# EAGLE board Stepper5_backup (EAGLE 7.6.0)
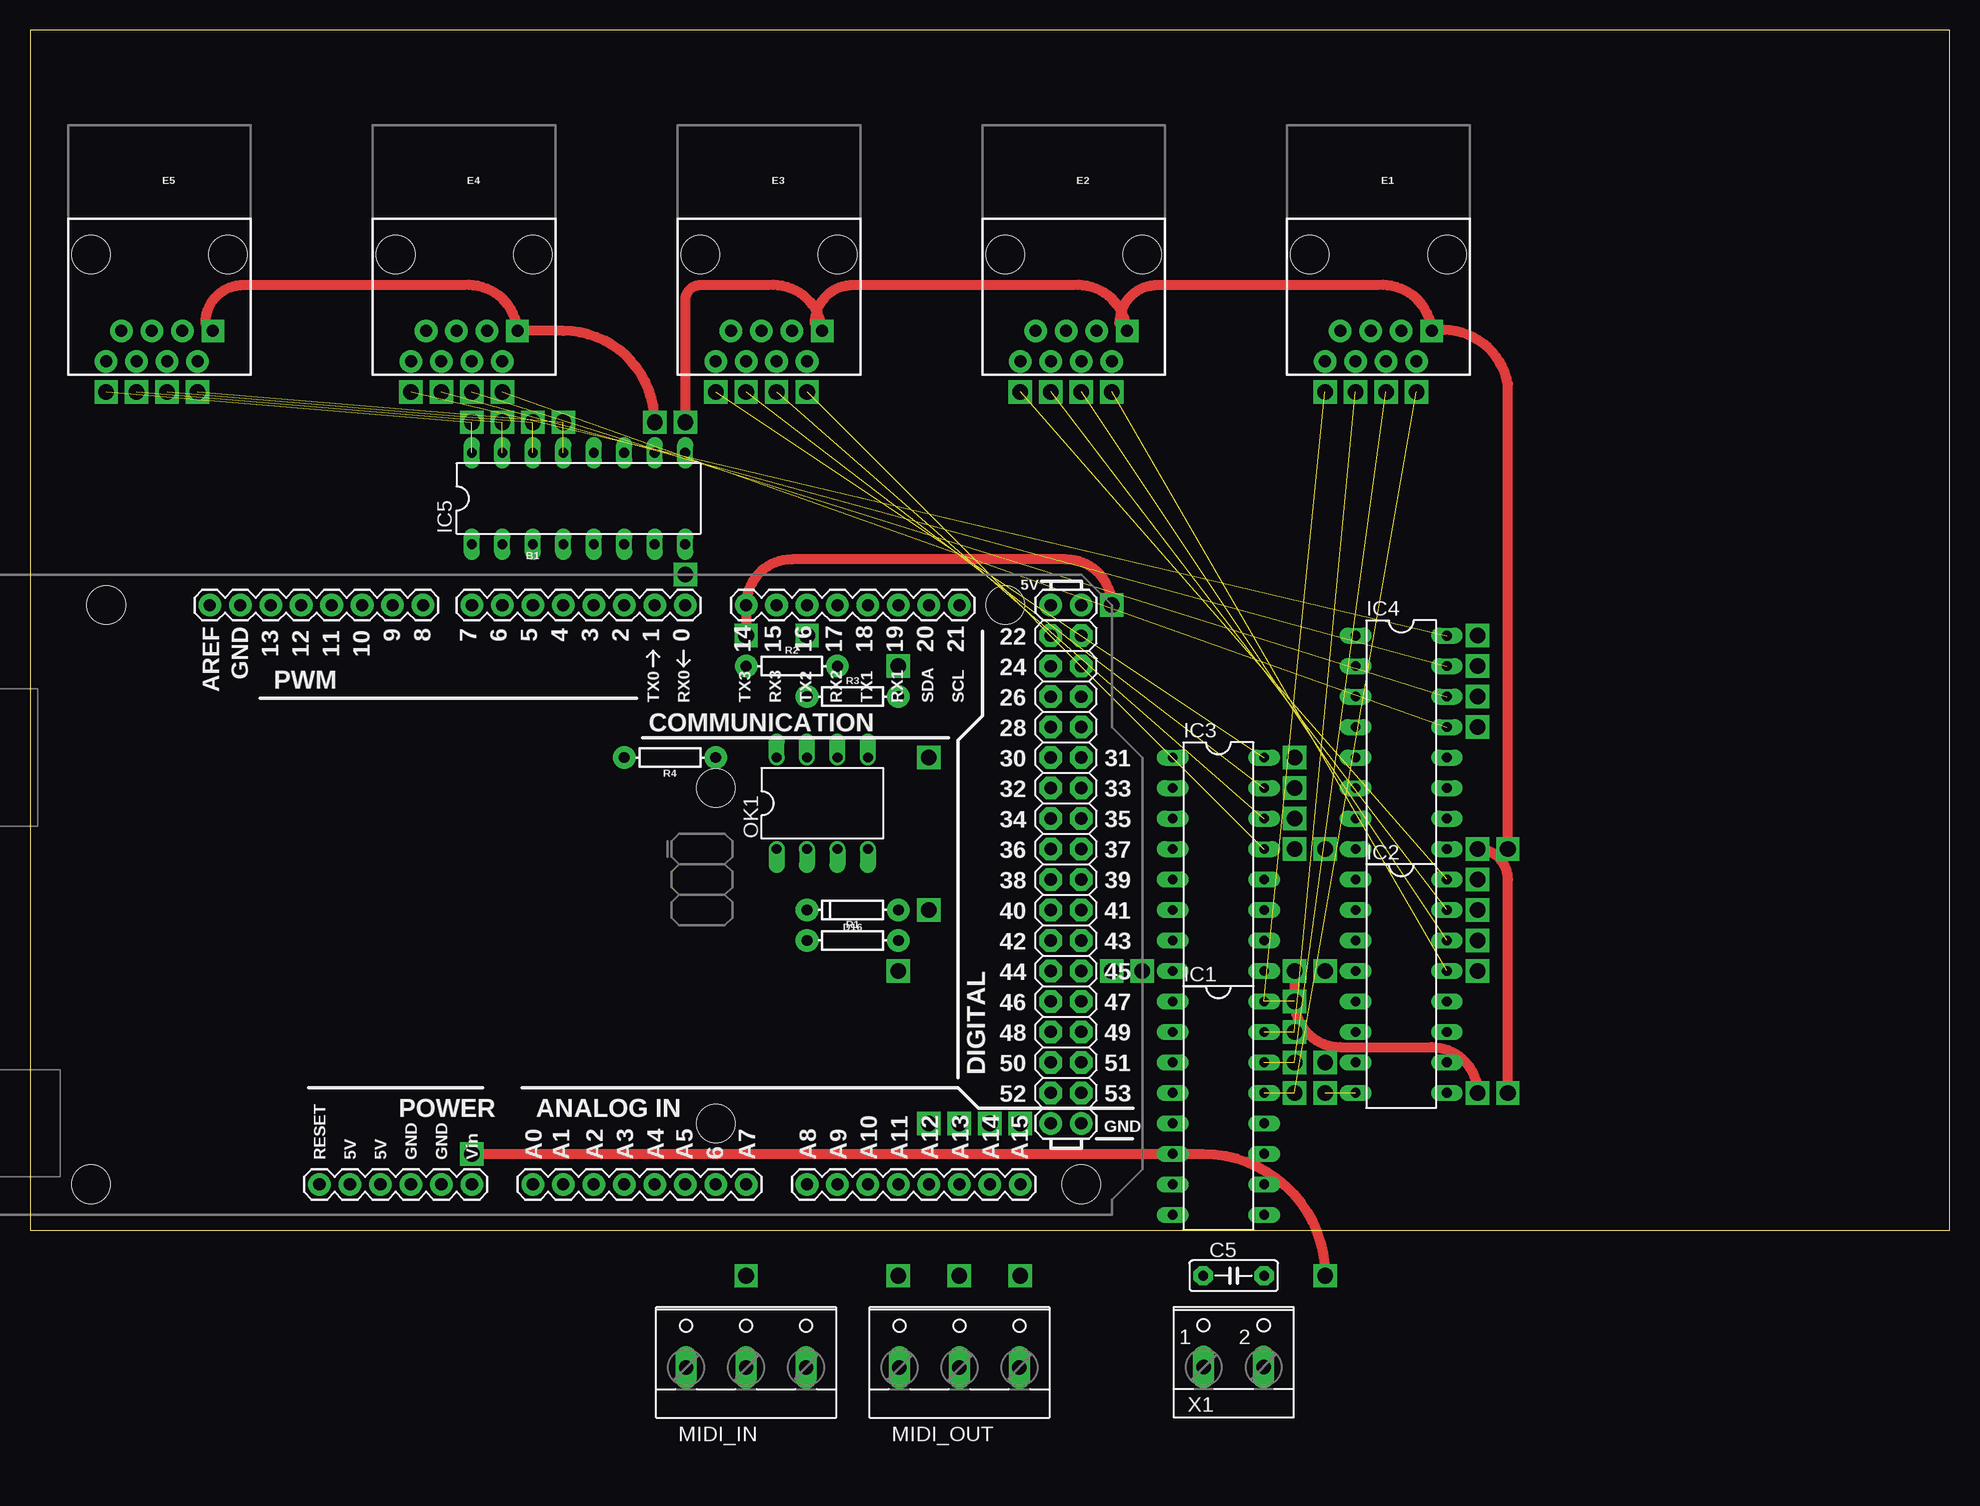
[diagram p0: board, top side]
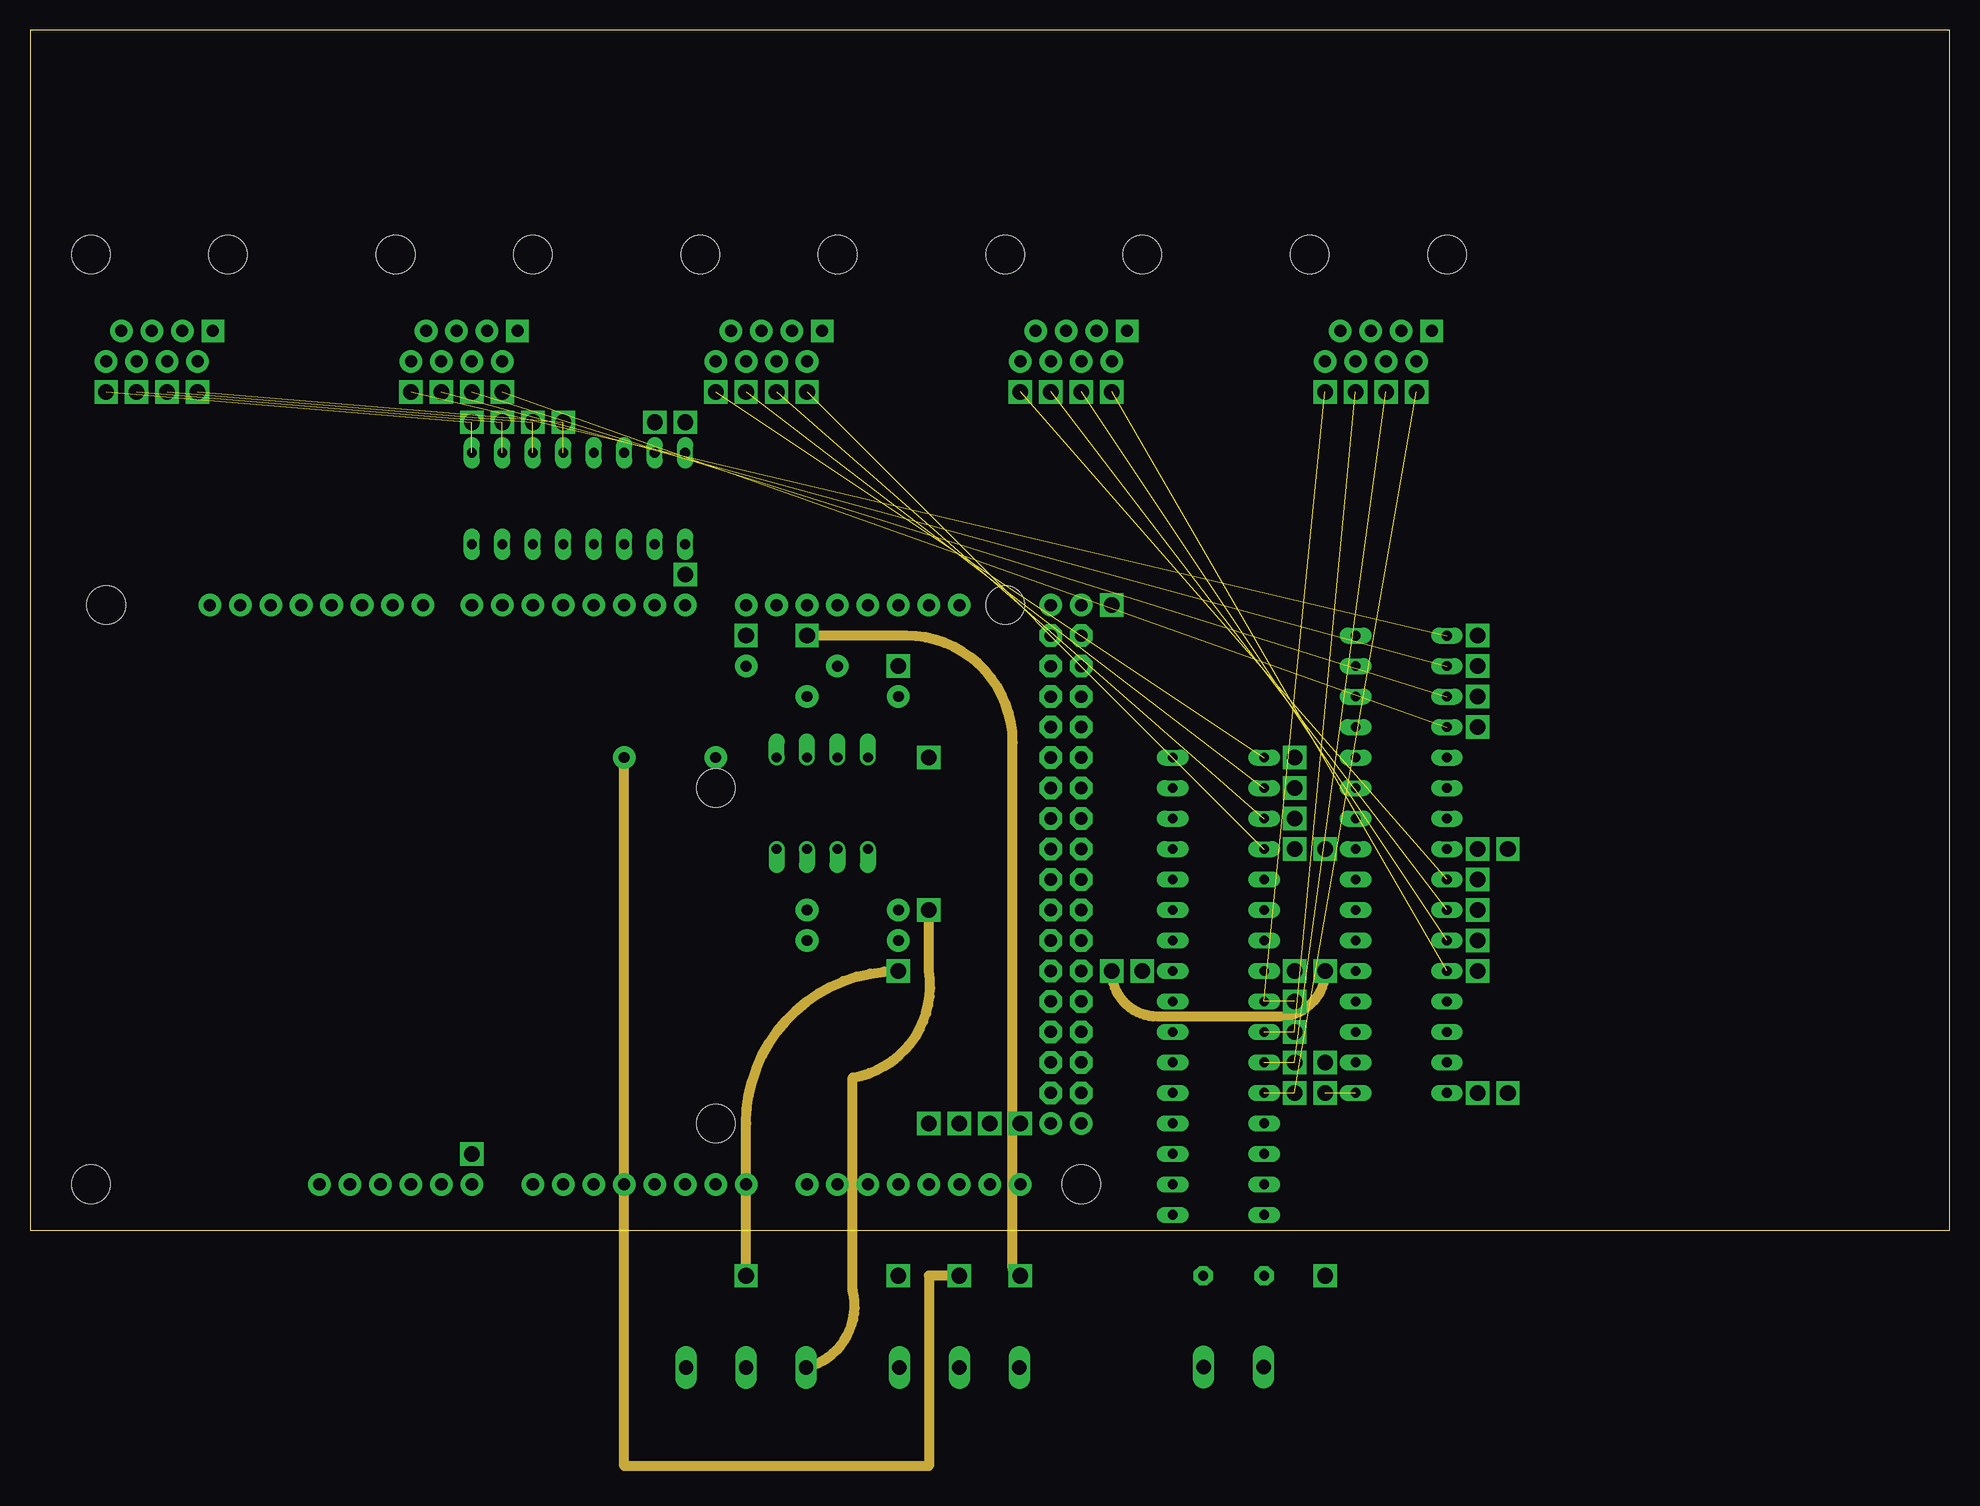
[diagram p1: board, inner layer FlyWire]
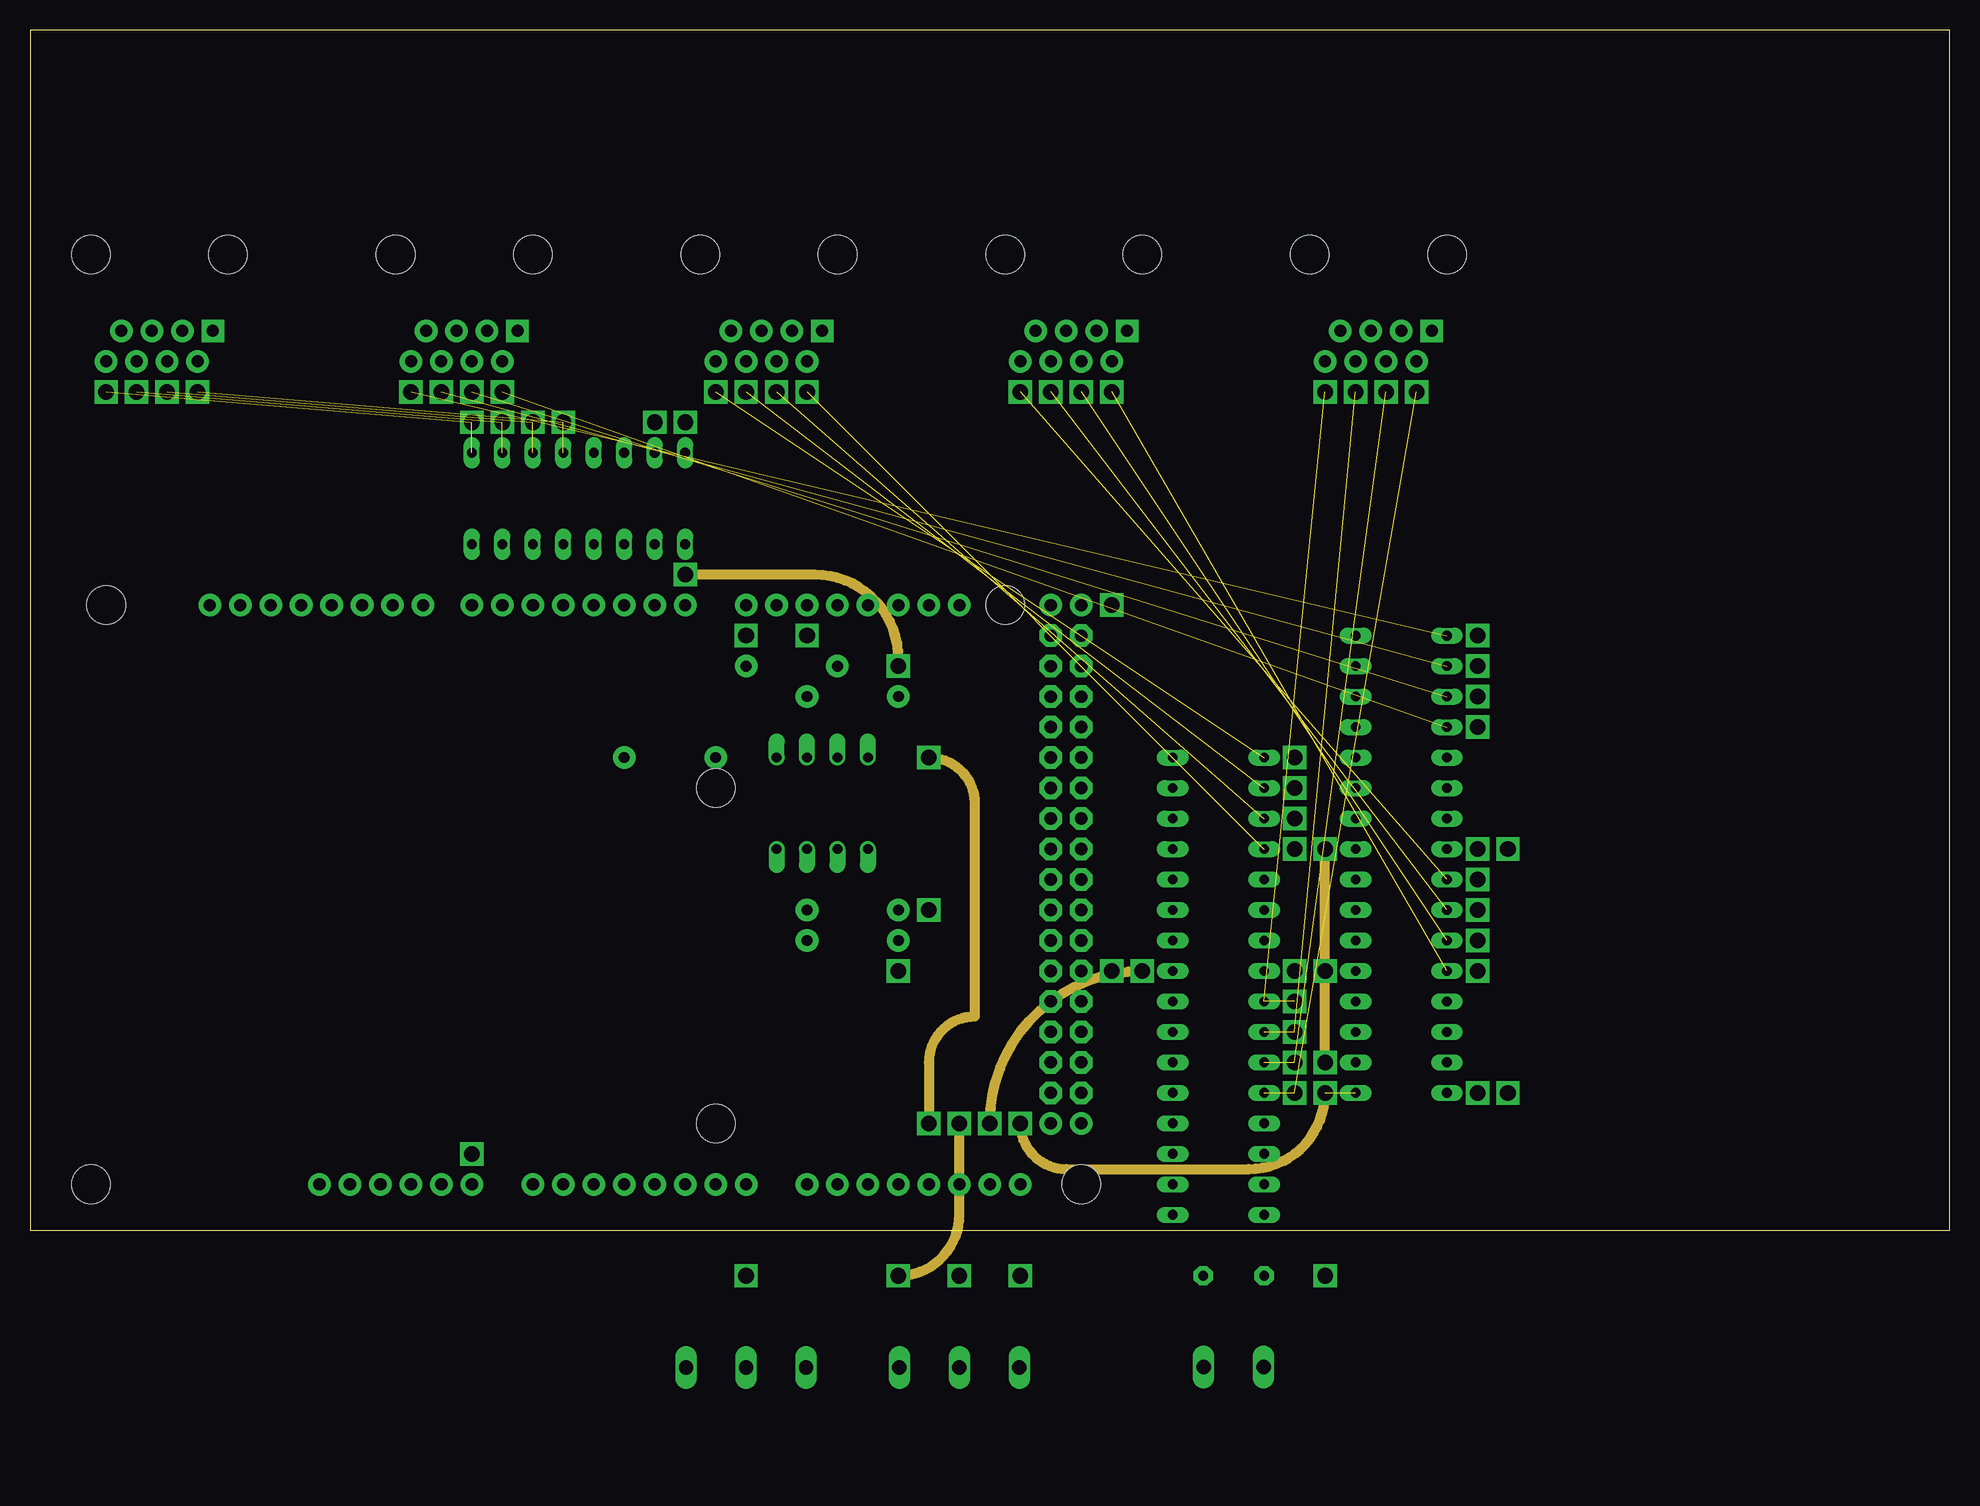
[diagram p2: board, inner layer WireGND]
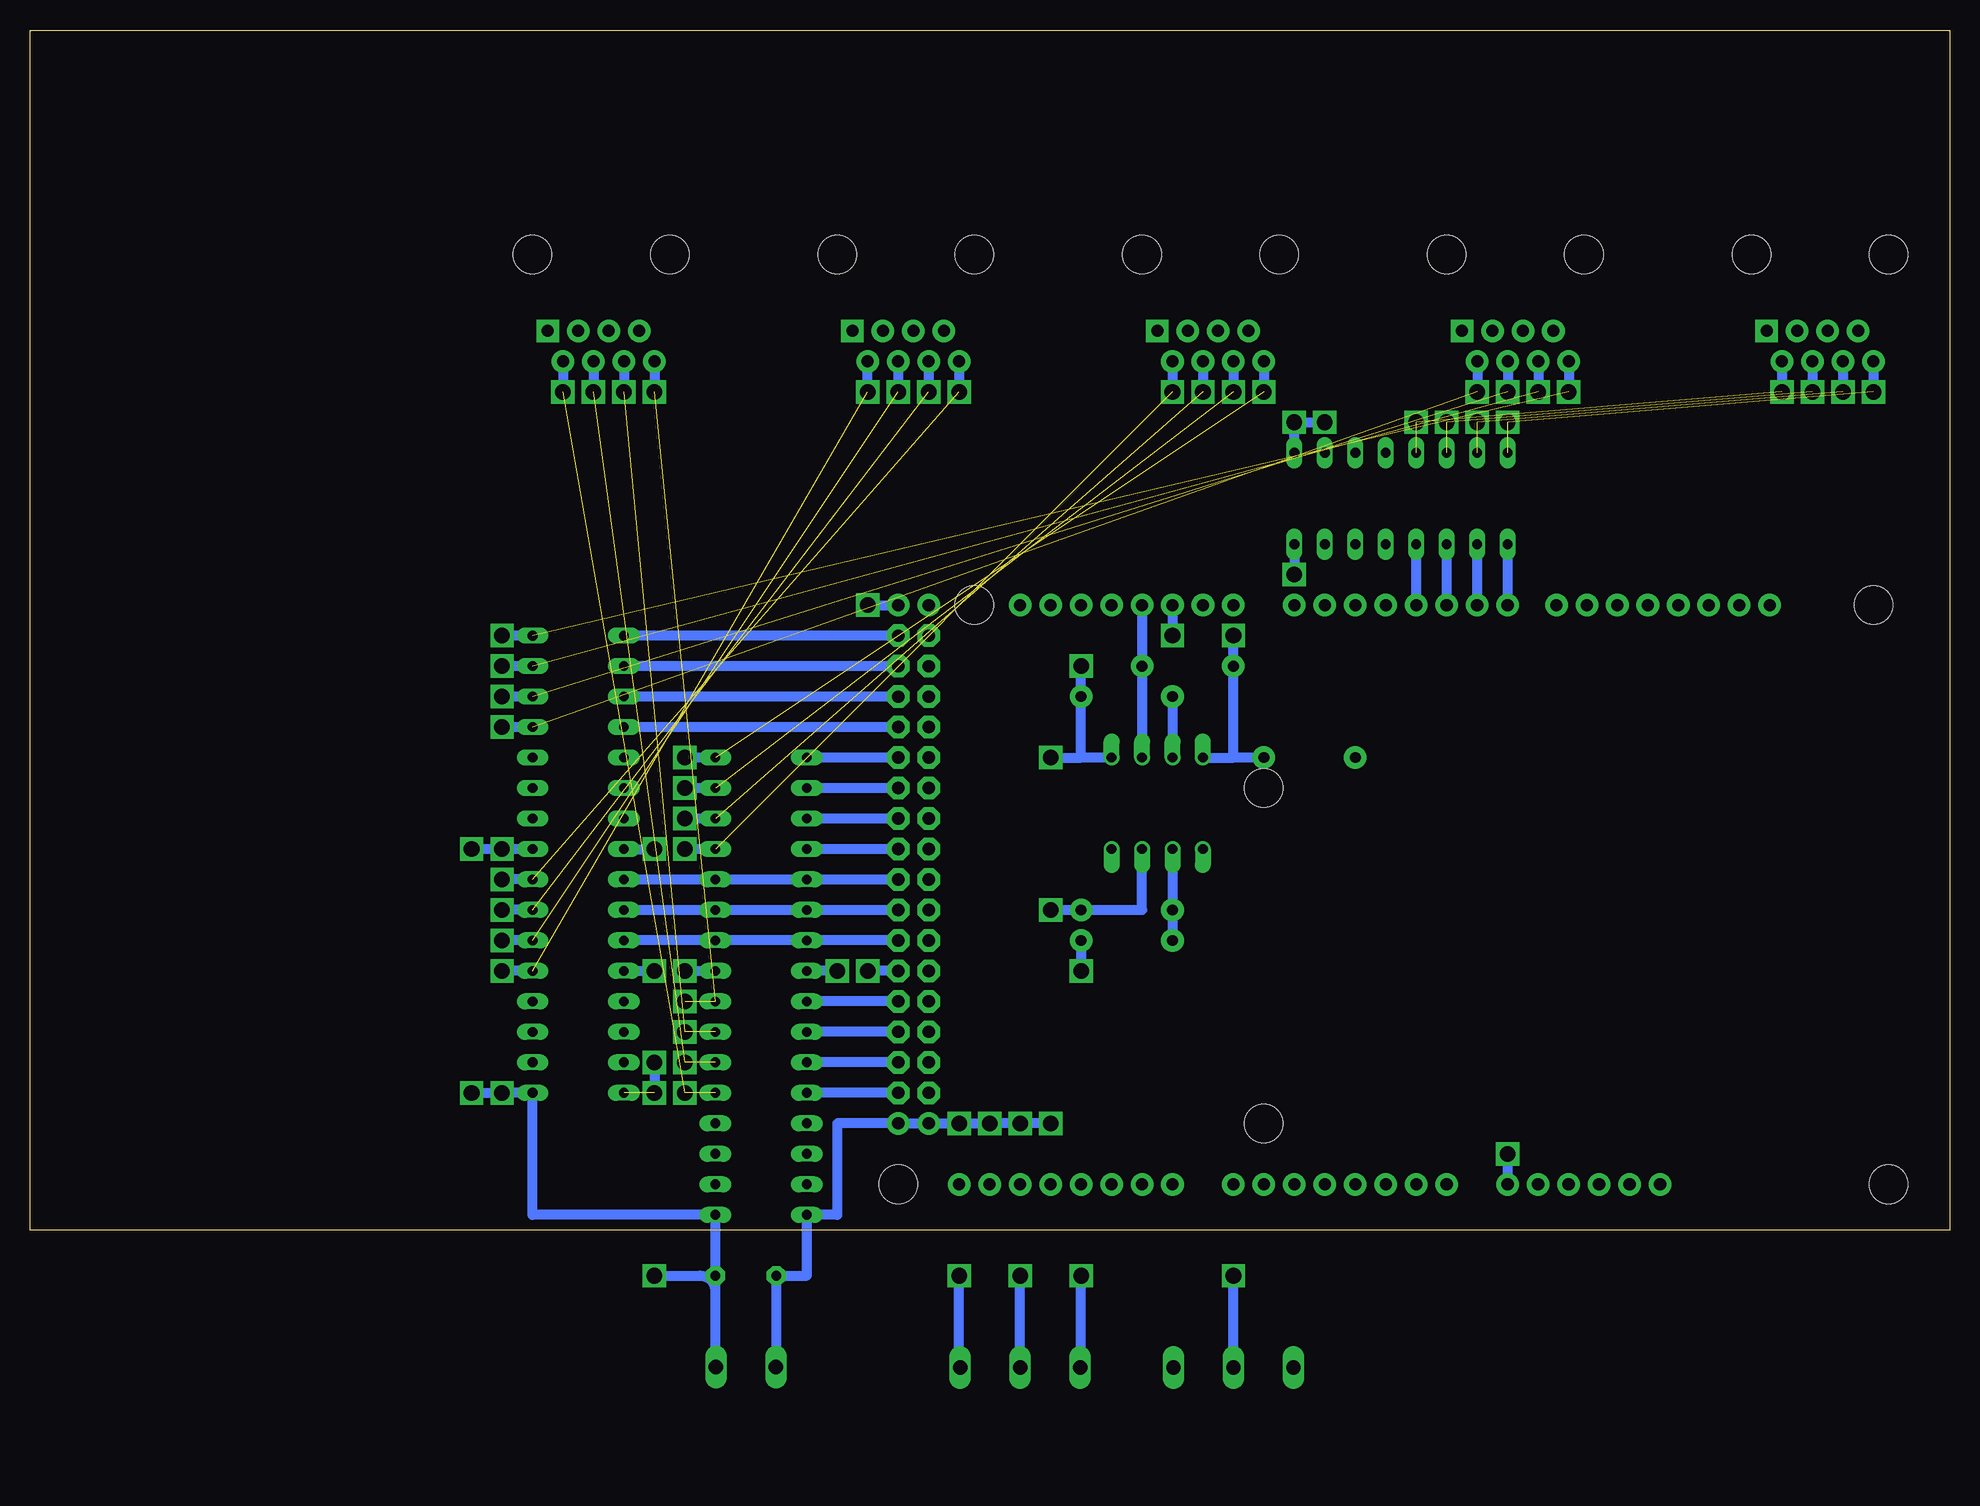
[diagram p3: board, bottom side, seen from below]

Size 160 x 100 mm. Coordinates in mm from the lower left corner, seen from the top.
Outline: 0,0 160,0 160,100 0,100 0,0
Copper layers (1*2*3*16): Wire5V 0.035mm / dielectric 1.5mm / FlyWire 0.035mm / dielectric 0.15mm / WireGND 0.035mm / dielectric 0.2mm / Bottom 0.035mm
Design rules "default *": minimum track width 10mil, minimum drill 24mil, track to track 8mil, track to pad 8mil, pad to pad 8mil, via to via 8mil, smd to smd 8mil, copper to edge 40mil, drill to drill 8mil, minimum pad ring 10mil, minimum via ring 8mil, stop-mask expansion 4mil, vias tented up to drill 0mil, thermal gap 10mil
Net classes: 1 GND: width 1.016 mm, drill 0.508 mm, clearance 0.508 mm

## Footprints (pad centres in the part's own frame; a part is rotated, then mirrored left to right if it is on the bottom)
ARDUINO_MEGA = drill 1.016 pad 1.88: 0 13.97,24.13; 1 11.43,24.13; 2 8.89,24.13; 3 6.35,24.13; 3.3V -13.97,-24.13; 4 3.81,24.13; 5 1.27,24.13; 5V@0 -11.43,-24.13; 5V@1 44.45,24.13; 5V@2 46.99,24.13; 6 -1.27,24.13; 7 -3.81,24.13; 8 -7.874,24.13; 9 -10.414,24.13; 10 -12.954,24.13; 11 -15.494,24.13; 12 -18.034,24.13; 13 -20.574,24.13; 14 19.05,24.13; 15 21.59,24.13; 16 24.13,24.13; 17 26.67,24.13; 18 29.21,24.13; 19 31.75,24.13; 20 34.29,24.13; 21 36.83,24.13; A0 1.27,-24.13; A1 3.81,-24.13; A2 6.35,-24.13; A3 8.89,-24.13; A4 11.43,-24.13; A5 13.97,-24.13; A6 16.51,-24.13; A7 19.05,-24.13; A8 24.13,-24.13; A9 26.67,-24.13; A10 29.21,-24.13; A11 31.75,-24.13; A12 34.29,-24.13; A13 36.83,-24.13; A14 39.37,-24.13; A15 41.91,-24.13; AREF -25.654,24.13; GND@0 -8.89,-24.13; GND@1 -6.35,-24.13; GND@2 44.45,-19.05; GND@3 46.99,-19.05; GND@4 -23.114,24.13; RESET -16.51,-24.13; VIN -3.81,-24.13 | drill 1.016 pad 1.88 octagon: 22 44.45,21.59; 23 46.99,21.59; 24 44.45,19.05; 25 46.99,19.05; 26 44.45,16.51; 27 46.99,16.51; 28 44.45,13.97; 29 46.99,13.97; 30 44.45,11.43; 31 46.99,11.43; 32 44.45,8.89; 33 46.99,8.89; 34 44.45,6.35; 35 46.99,6.35; 36 44.45,3.81; 37 46.99,3.81; 38 44.45,1.27; 39 46.99,1.27; 40 44.45,-1.27; 41 46.99,-1.27; 42 44.45,-3.81; 43 46.99,-3.81; 44 44.45,-6.35; 45 46.99,-6.35; 46 44.45,-8.89; 47 46.99,-8.89; 48 44.45,-11.43; 49 46.99,-11.43; 50 44.45,-13.97; 51 46.99,-13.97; 52 44.45,-16.51; 53 46.99,-16.51 | hole 3.2: -34.29,24.13; -35.56,-24.13; 16.51,8.89; 16.51,-19.05; 40.64,24.13; 46.99,-24.13
C5B2.5 = drill 0.813 pad 1.6 octagon: 1 -2.54,0; 2 2.54,0
DIODE-1N4148 = drill 0.9 pad 1.88: A -3.81,0; C 3.81,0
RJ45-8 = drill 1 pad 1.88 square: 1 -4.445,6.35 | drill 1 pad 1.88: 2 -3.175,8.89; 3 -1.905,6.35; 4 -0.635,8.89; 5 0.635,6.35; 6 1.905,8.89; 7 3.175,6.35; 8 4.445,8.89 | hole 3.2: -5.715,0; 5.715,0
DIL16 = drill 0.813 long: 1 -8.89,-3.81; 2 -6.35,-3.81; 3 -3.81,-3.81; 4 -1.27,-3.81; 5 1.27,-3.81; 6 3.81,-3.81; 7 6.35,-3.81; 8 8.89,-3.81; 9 8.89,3.81; 10 6.35,3.81; 11 3.81,3.81; 12 1.27,3.81; 13 -1.27,3.81; 14 -3.81,3.81; 15 -6.35,3.81; 16 -8.89,3.81
W237-103 = drill 1.194 long: 1 -5,-1.29; 2 0,-1.29; 3 5,-1.29
DIL08 = drill 0.813 offset: 1 -3.81,-3.81; 2 -1.27,-3.81; 3 1.27,-3.81; 4 3.81,-3.81; 5 3.81,3.81; 6 1.27,3.81; 7 -1.27,3.81; 8 -3.81,3.81
AXIAL-0.3 = drill 0.9 pad 1.88: P$1 -3.81,0; P$2 3.81,0
W237-102 = drill 1.194 long: 1 -2.5,-1.27; 2 2.5,-1.27

## Placement (x,y rotation side)
B1  ARDUINO_MEGA_R3FULL  [ARDUINO_MEGA]  40.64,27.94 0 top
C5  50nF  [C5B2.5]  100.33,-3.81 0 top  (outside the outline)
D16  200mA/100V/1V  [DIODE-1N4148]  68.58,26.67 180 top
E1  RJ45  [RJ45-8]  112.39,81.28 180 top
E2  RJ45  [RJ45-8]  87,81.28 180 top
E3  RJ45  [RJ45-8]  61.59,81.28 180 top
E4  RJ45  [RJ45-8]  36.2,81.28 180 top
E5  RJ45  [RJ45-8]  10.79,81.28 180 top
IC1  ULN2003AN  [DIL16]  99.06,10.16 270 top
IC2  ULN2003AN  [DIL16]  114.3,20.32 270 top
IC3  ULN2003AN  [DIL16]  99.06,30.48 270 top
IC4  ULN2003AN  [DIL16]  114.3,40.64 270 top
IC5  ULN2003AN  [DIL16]  45.72,60.96 0 top
MIDI_IN  [W237-103]  59.69,-10.16 0 top  (outside the outline)
MIDI_OUT  [W237-103]  77.47,-10.16 0 top  (outside the outline)
OK1  6N138  [DIL08]  66.04,35.56 0 top
R1  220  [AXIAL-0.3]  68.58,24.13 0 top
R2  220  [AXIAL-0.3]  63.5,46.99 0 top
R3  4K7  [AXIAL-0.3]  68.58,44.45 0 top
R4  220  [AXIAL-0.3]  53.34,39.37 180 top
X1  [W237-102]  100.33,-10.16 0 top  (outside the outline)

## Library data of the parts
B1 = SparkFun-Boards
C5 = capacitor-wima
D16 = SparkFun-DiscreteSemi; PROD_ID: DIO-08378
E1-E5 = SparkFun-Connectors; PROD_ID: CONN-08506; SF_ID: PRT-00643
IC1-IC5 = uln-udn
MIDI_IN MIDI_OUT = con-wago-500; MPN: 237-103; OC_FARNELL: unknown; OC_NEWARK: 18M7116
OK1 = optocoupler; MF: VISHAY/TELEFUNKEN; MPN: 6N138; OC_FARNELL: 9860150; OC_NEWARK: 35K5294
R1-R4 = SparkFun-Resistors; PROD_ID: RES-08380
X1 = con-wago-500; MPN: 237-102; OC_FARNELL: unknown; OC_NEWARK: 70K9898

## Nets
1N1: B1.47 IC1.1
1N2: B1.49 IC1.2
1N3: B1.51 IC1.3
1N4: B1.53 IC1.4
1S1: E1.8 IC1.16
1S2: E1.6 IC1.15
1S3: E1.4 IC1.14
1S4: E1.2 IC1.13
2N1: B1.39 IC2.1
2N2: B1.41 IC2.2
2N3: B1.43 IC2.3
2N4: B1.45 IC2.4
2S1: E2.8 IC2.16
2S2: E2.6 IC2.15
2S3: E2.4 IC2.14
2S4: E2.2 IC2.13
3N1: B1.31 IC3.1
3N2: B1.33 IC3.2
3N3: B1.35 IC3.3
3N4: B1.37 IC3.4
3S1: E3.8 IC3.16
3S2: E3.6 IC3.15
3S3: E3.4 IC3.14
3S4: E3.2 IC3.13
4N1: B1.23 IC4.1
4N2: B1.25 IC4.2
4N3: B1.27 IC4.3
4N4: B1.29 IC4.4
4S1: E4.8 IC4.16
4S2: E4.6 IC4.15
4S3: E4.4 IC4.14
4S4: E4.2 IC4.13
5N1: B1.7 IC5.1
5N2: B1.6 IC5.2
5N3: B1.5 IC5.3
5N4: B1.4 IC5.4
5S1: E5.8 IC5.16
5S2: E5.6 IC5.15
5S3: E5.4 IC5.14
5S4: E5.2 IC5.13
+5V: B1.VIN C5.2 E1.1 E2.1 E3.1 E4.1 E5.1 IC1.9 IC2.9 IC3.9 IC4.9 IC5.9 X1.2
AR5V: B1.5V@2 OK1.8 R2.P$1 R4.P$1
GND [GND]: B1.GND@2 B1.GND@3 C5.1 IC1.8 IC2.8 IC3.8 IC4.8 IC5.8 MIDI_OUT.1 OK1.5 R3.P$2 X1.1
N$2: MIDI_OUT.2 R4.P$2
N$25: D16.A MIDI_IN.3 OK1.3
N$26: D16.C OK1.2 R1.P$1
N$27: MIDI_IN.2 R1.P$2
N$29: OK1.7 R3.P$1
PRX: B1.17 OK1.6 R2.P$2
PTX: B1.16 MIDI_OUT.3

## Tracks (layer width: path | path; a pad name or v marks a point on that pad's centre or on a via)
1N1
  Bottom 0.813: B1.47 IC1.1
1N2
  Bottom 0.813: B1.49 IC1.2
1N3
  Bottom 0.813: B1.51 IC1.3
1N4
  Bottom 0.813: B1.53 IC1.4
1S1  (via drill 1.3)  (2 unrouted)
  Bottom 0.813: E1.8 v107.95,69.85
  other vias: 105.41,19.05
1S2  (via drill 1.3)  (2 unrouted)
  Bottom 0.813: E1.6 v110.49,69.85
  other vias: 105.41,16.51
1S3  (via drill 1.3)  (2 unrouted)
  Bottom 0.813: E1.4 v113.03,69.85
  other vias: 105.41,13.97
1S4  (via drill 1.3)  (2 unrouted)
  Bottom 0.813: E1.2 v115.57,69.85
  other vias: 105.41,11.43
2N1
  Bottom 0.813: IC2.1 B1.39
2N2
  Bottom 0.813: IC2.2 B1.41
2N3
  Bottom 0.813: B1.43 IC2.3
2N4  (via drill 1.3)
  FlyWire 0.813: v107.95,21.59 arc-90 104.14,17.78 93.98,17.78 arc-90 v90.17,21.59
  Bottom 0.813: B1.45 v90.17,21.59 | IC2.4 v107.95,21.59
2S1  (via drill 1.3)  (1 unrouted)
  Bottom 0.813: E2.8 v82.55,69.85 | IC2.16 v120.65,29.21
2S2  (via drill 1.3)  (1 unrouted)
  Bottom 0.813: E2.6 v85.09,69.85 | IC2.15 v120.65,26.67
2S3  (via drill 1.3)  (1 unrouted)
  Bottom 0.813: E2.4 v87.63,69.85 | IC2.14 v120.65,24.13
2S4  (via drill 1.3)  (1 unrouted)
  Bottom 0.813: v90.17,69.85 E2.2 | IC2.13 v120.65,21.59
3N1
  Bottom 0.813: B1.31 IC3.1
3N2
  Bottom 0.813: B1.33 IC3.2
3N3
  Bottom 0.813: B1.35 IC3.3
3N4
  Bottom 0.813: B1.37 IC3.4
3S1  (via drill 1.3)  (1 unrouted)
  Bottom 0.813: E3.8 v57.15,69.85 | IC3.16 v105.41,39.37
3S2  (via drill 1.3)  (1 unrouted)
  Bottom 0.813: E3.6 v59.69,69.85 | IC3.15 v105.41,36.83
3S3  (via drill 1.3)  (1 unrouted)
  Bottom 0.813: E3.4 v62.23,69.85 | IC3.14 v105.41,34.29
3S4  (via drill 1.3)  (1 unrouted)
  Bottom 0.813: E3.2 v64.77,69.85 | IC3.13 v105.41,31.75
4N1
  Bottom 0.813: B1.23 IC4.1
4N2
  Bottom 0.813: B1.25 IC4.2
4N3
  Bottom 0.813: B1.27 IC4.3
4N4
  Bottom 0.813: B1.29 IC4.4
4S1  (via drill 1.3)  (1 unrouted)
  Bottom 0.813: E4.8 v31.75,69.85 | IC4.16 v120.65,49.53
4S2  (via drill 1.3)  (1 unrouted)
  Bottom 0.813: E4.6 v34.29,69.85 | IC4.15 v120.65,46.99
4S3  (via drill 1.3)  (1 unrouted)
  Bottom 0.813: E4.4 v36.83,69.85 | IC4.14 v120.65,44.45
4S4  (via drill 1.3)  (1 unrouted)
  Bottom 0.813: E4.2 v39.37,69.85 | IC4.13 v120.65,41.91
5N1
  Bottom 0.813: B1.7 IC5.1
5N2
  Bottom 0.813: B1.6 IC5.2
5N3
  Bottom 0.813: B1.5 IC5.3
5N4
  Bottom 0.813: B1.4 IC5.4
5S1  (via drill 1.3)  (2 unrouted)
  Bottom 0.813: E5.8 v6.35,69.85
  other vias: 36.83,67.31
5S2  (via drill 1.3)  (2 unrouted)
  Bottom 0.813: E5.6 v8.89,69.85
  other vias: 39.37,67.31
5S3  (via drill 1.3)  (2 unrouted)
  Bottom 0.813: E5.4 v11.43,69.85
  other vias: 41.91,67.31
5S4  (via drill 1.3)  (2 unrouted)
  Bottom 0.813: E5.2 v13.97,69.85
  other vias: 44.45,67.31
+5V  (via drill 1.3)
  Wire5V 0.813: v105.41,21.59 105.41,19.05 arc90 109.22,15.24 116.84,15.24 arc-90 v120.65,11.43 | v123.19,11.43 123.19,29.21 arc90 v120.65,31.75 | v123.19,31.75 123.19,70.48 arc90 E1.1 arc90 112.39,78.74 93.98,78.74 arc90 90.81,75.56 E2.1 arc90 87,78.74 68.58,78.74 arc90 65.41,75.56 E3.1 arc90 61.59,78.74 55.88,78.74 arc90 54.61,77.47 v54.61,67.31 | v52.07,67.31 arc90 44.45,74.93 E4.1 arc90 36.2,78.74 17.78,78.74 arc90 14.61,75.56 E5.1 | v36.83,6.35 97.79,6.35 arc-90 v107.95,-3.81
  Bottom 0.813: X1.2 102.87,-11.43 102.87,-5.08 | 102.87,-5.08 C5.2 IC1.9 118.11,1.27 IC2.9 v120.65,11.43 v123.19,11.43 | IC5.9 v54.61,67.31 v52.07,67.31 | IC4.9 v120.65,31.75 v123.19,31.75 | v105.41,21.59 IC3.9 | B1.VIN v36.83,6.35 | v107.95,-3.81 104.14,-3.81 arc90 102.87,-5.08
AR5V  (via drill 1.3)
  Wire5V 0.813: v90.17,52.07 arc90 86.36,55.88 63.5,55.88 arc90 59.69,52.07 v59.69,49.53
  Bottom 0.813: OK1.8 59.69,39.37 | 59.69,39.37 R2.P$1 v59.69,49.53 | R4.P$1 59.69,39.37 | v90.17,52.07 B1.5V@2
GND  (via drill 1.3)  (1 unrouted)
  WireGND 0.813: v82.55,8.89 arc90 86.36,5.08 101.6,5.08 arc90 v107.95,11.43 | v80.01,8.89 arc-90 v92.71,21.59 | v107.95,13.97 v107.95,31.75 | v72.39,-3.81 arc90 77.47,1.27 v77.47,8.89 | v74.93,39.37 arc-90 78.74,35.56 78.74,17.78 arc90 74.93,13.97 v74.93,8.89 | v72.39,46.99 72.39,47.62 arc90 65.41,54.61 v54.61,54.61
  Bottom 0.813: OK1.5 72.39,39.37 | 72.39,39.37 R3.P$2 v72.39,46.99 | X1.1 97.79,-11.43 C5.1 95.25,-3.81 IC1.8 92.71,1.27 92.71,8.89 B1.GND@3 B1.GND@2 v82.55,8.89 v80.01,8.89 v77.47,8.89 v74.93,8.89 | v92.71,21.59 IC3.8 | IC4.8 v107.95,31.75 | IC5.8 v54.61,54.61 | v107.95,13.97 v107.95,11.43 | MIDI_OUT.1 72.39,-11.45 v72.39,-3.81 | v74.93,39.37 72.39,39.37
N$2  (via drill 1.3)
  FlyWire 0.813: v77.47,-3.81 74.93,-3.81 74.93,-19.68 49.53,-19.68 R4.P$2
  Bottom 0.813: MIDI_OUT.2 v77.47,-3.81
N$25  (via drill 1.3)
  FlyWire 0.813: MIDI_IN.3 arc90 68.58,-5.02 68.58,12.7 arc90 74.93,21.59 v74.93,26.67
  Bottom 0.813: OK1.3 67.31,26.67 D16.A v74.93,26.67
N$26
  Bottom 0.813: OK1.2 D16.C R1.P$1
N$27  (via drill 1.3)
  FlyWire 0.813: v59.69,-3.81 59.69,8.89 arc-90 v72.39,21.59
  Bottom 0.813: MIDI_IN.2 v59.69,-3.81 | R1.P$2 v72.39,21.59
N$29
  Bottom 0.813: R3.P$1 OK1.7
PRX
  Bottom 0.813: B1.17 R2.P$2 OK1.6
PTX  (via drill 1.3)
  FlyWire 0.813: v82.55,-3.81 arc-90 81.92,-3.17 81.92,40.64 arc90 73.03,49.53 v64.77,49.53
  Bottom 0.813: MIDI_OUT.3 arc90 82.55,-11.37 v82.55,-3.81 | B1.16 v64.77,49.53